# Altium PCB compactPCBv2.PcbDoc
Units mil, origin at the board's own origin, x right, y up, seen from the top; angles counter-clockwise.
Board outline 8500 x 8500 mil, 4 copper layers (LV, SIGLoop, OTHLoop, HV), stack 34.956 mil thick; 100 components, 24 nets, 160 pads, 0 vias.
Unrouted connection lines stored in the file: 1.
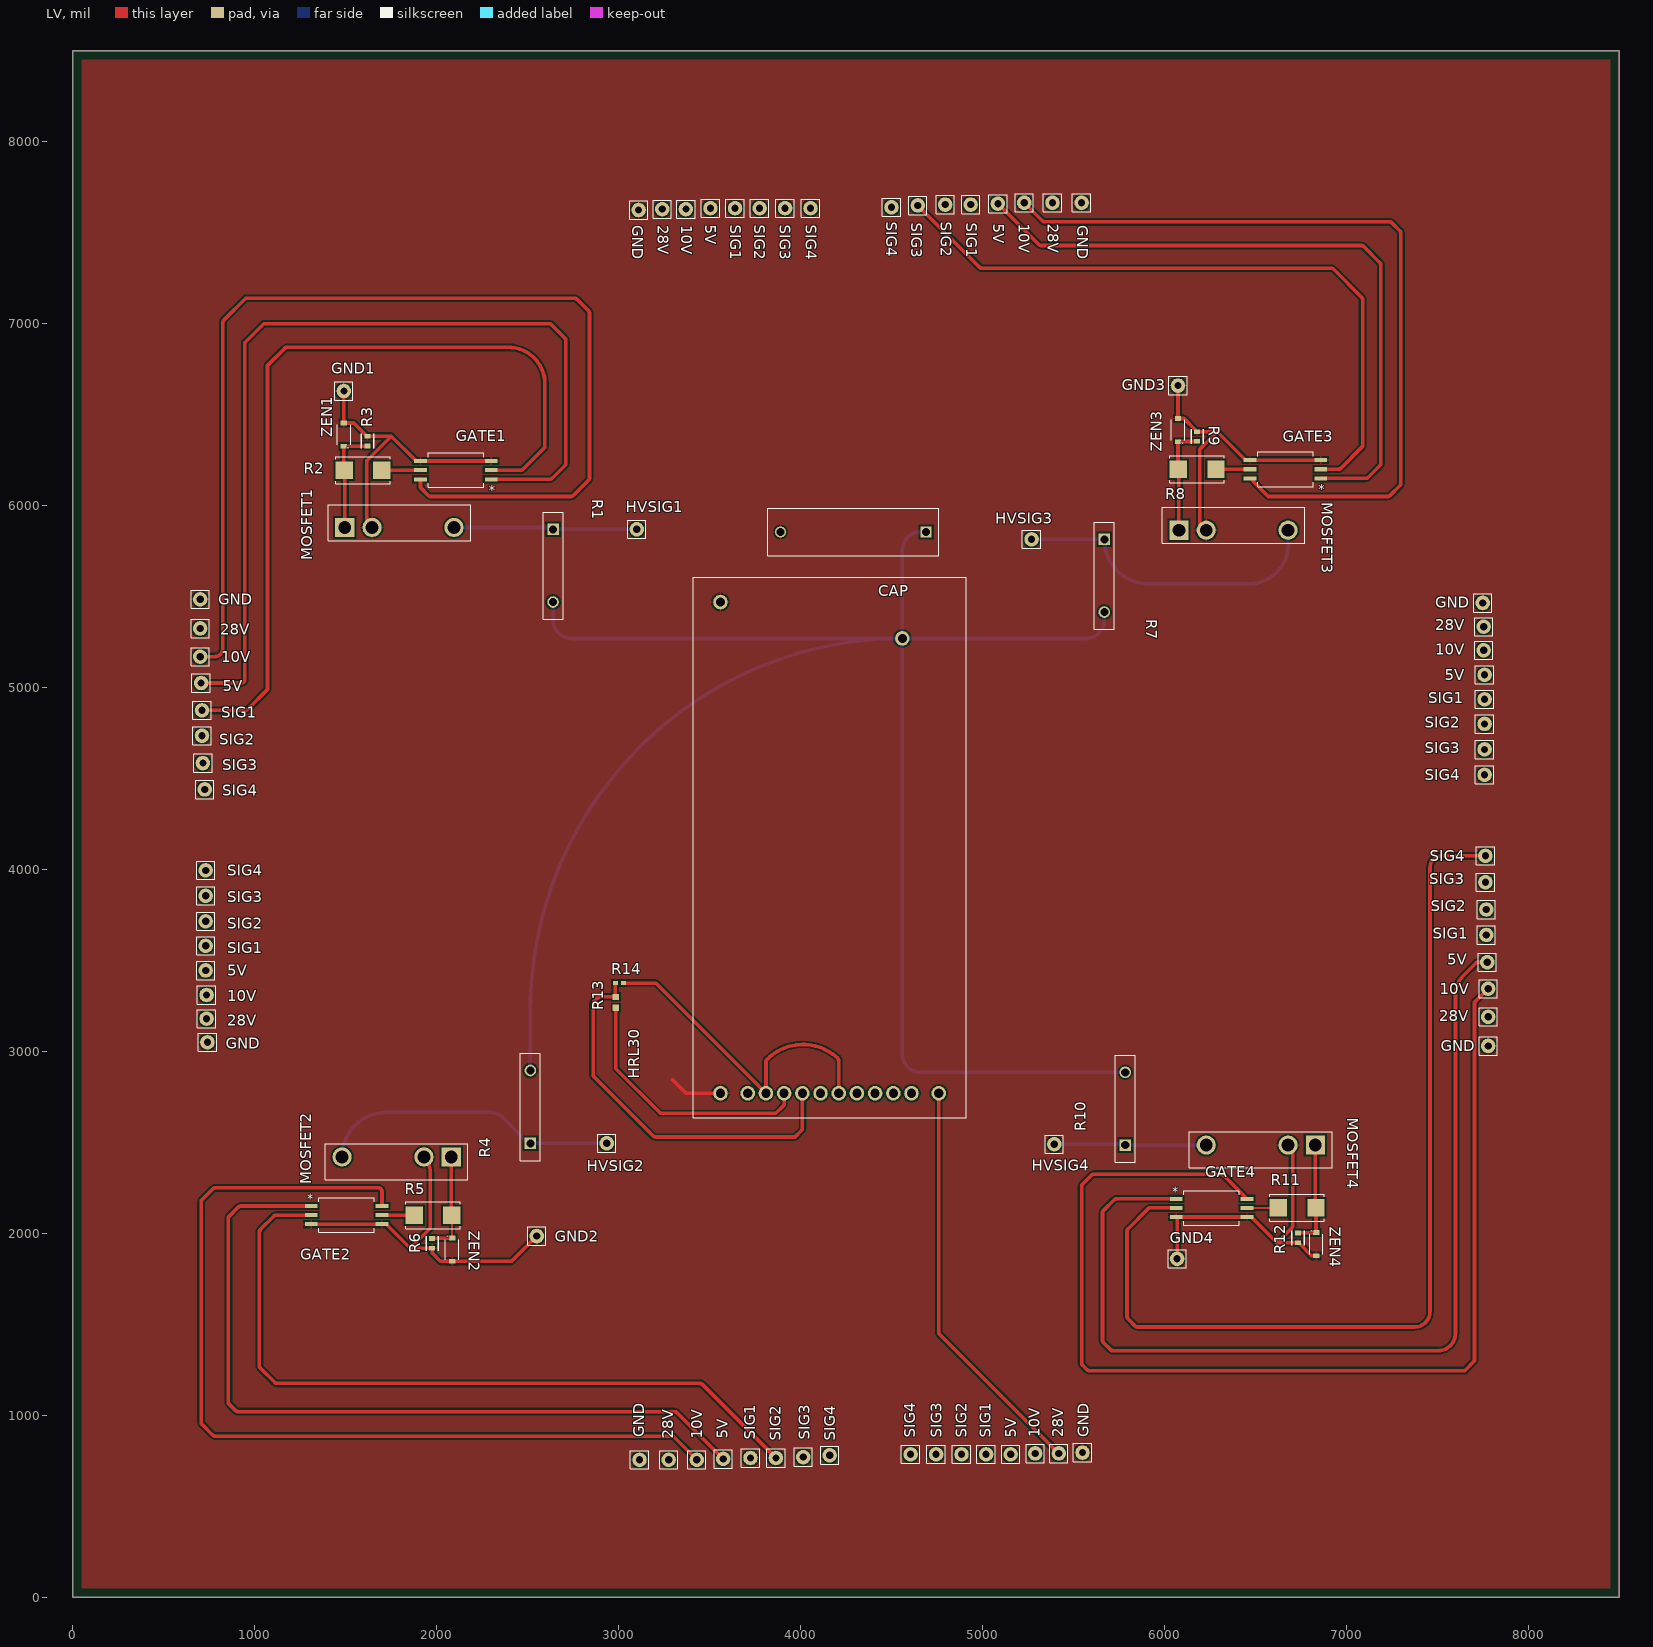
[diagram p0: LV view]
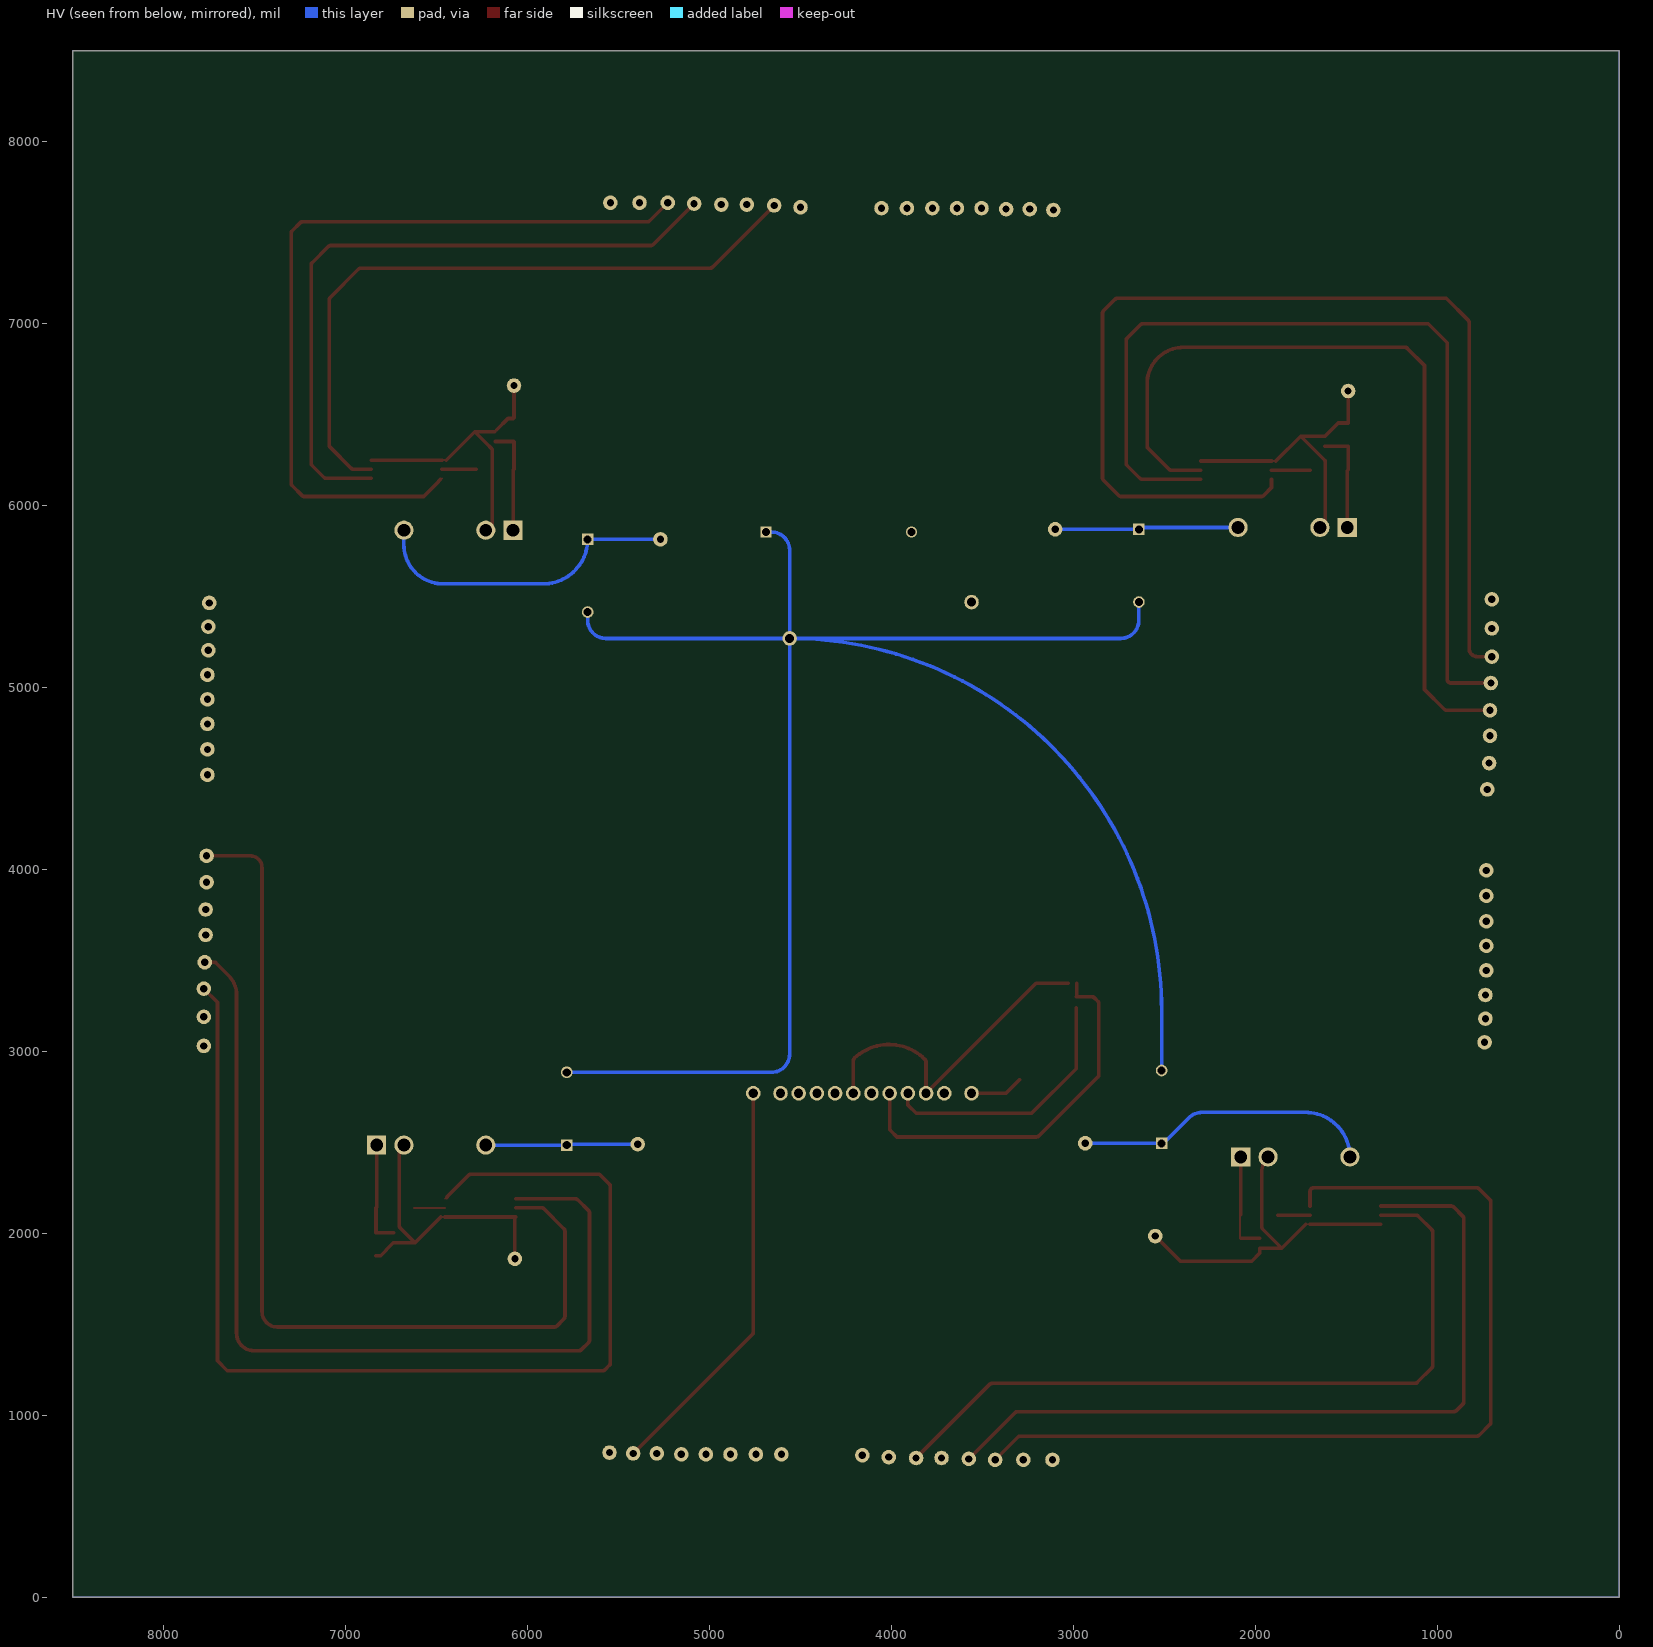
[diagram p1: HV view, seen from below]
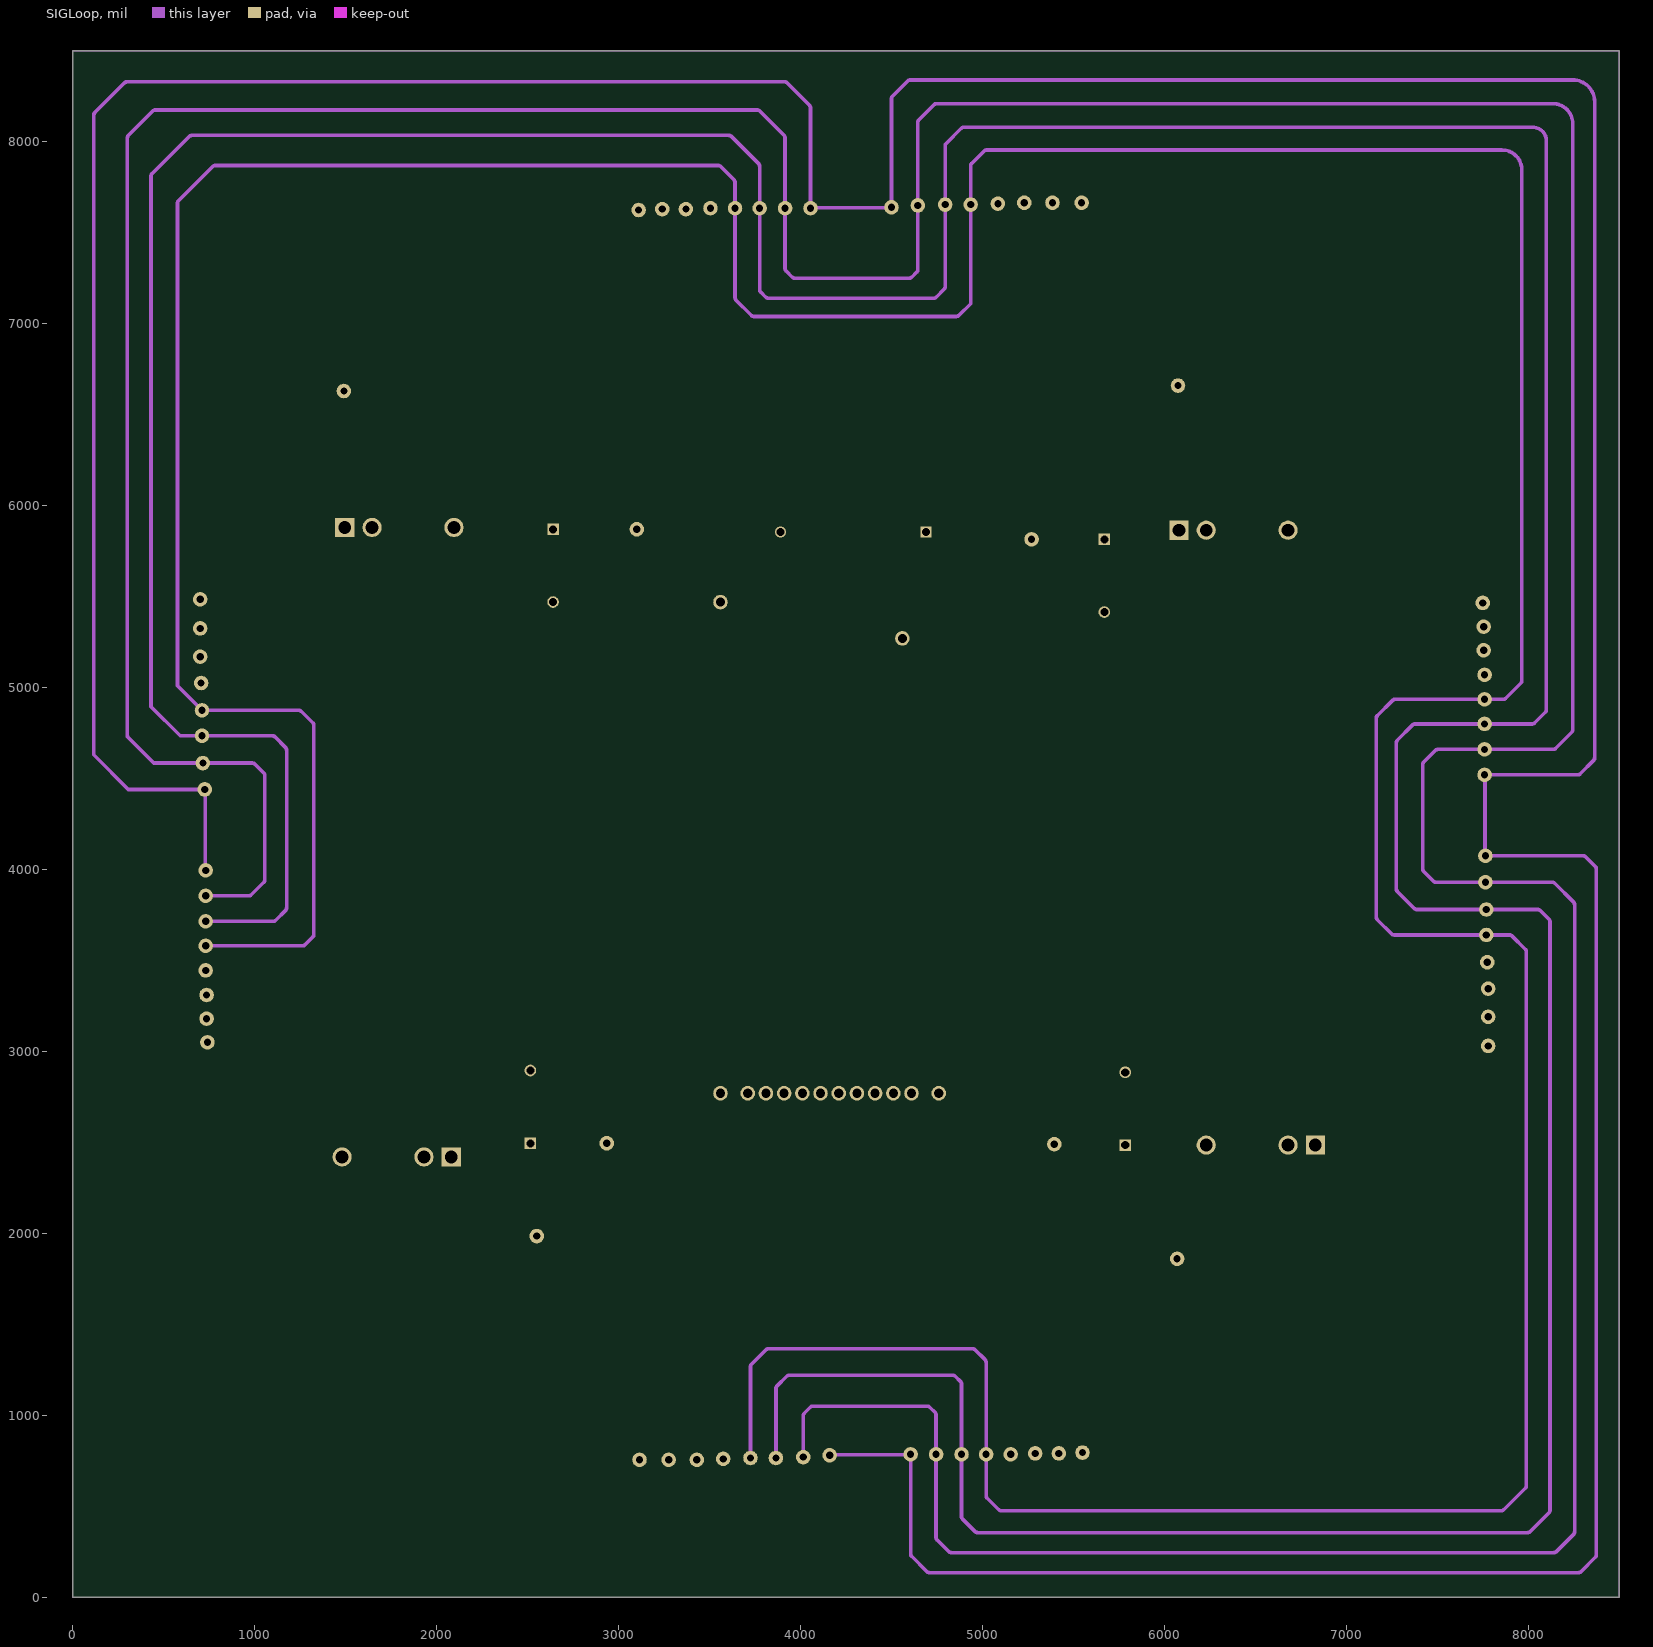
[diagram p2: SIGLoop]
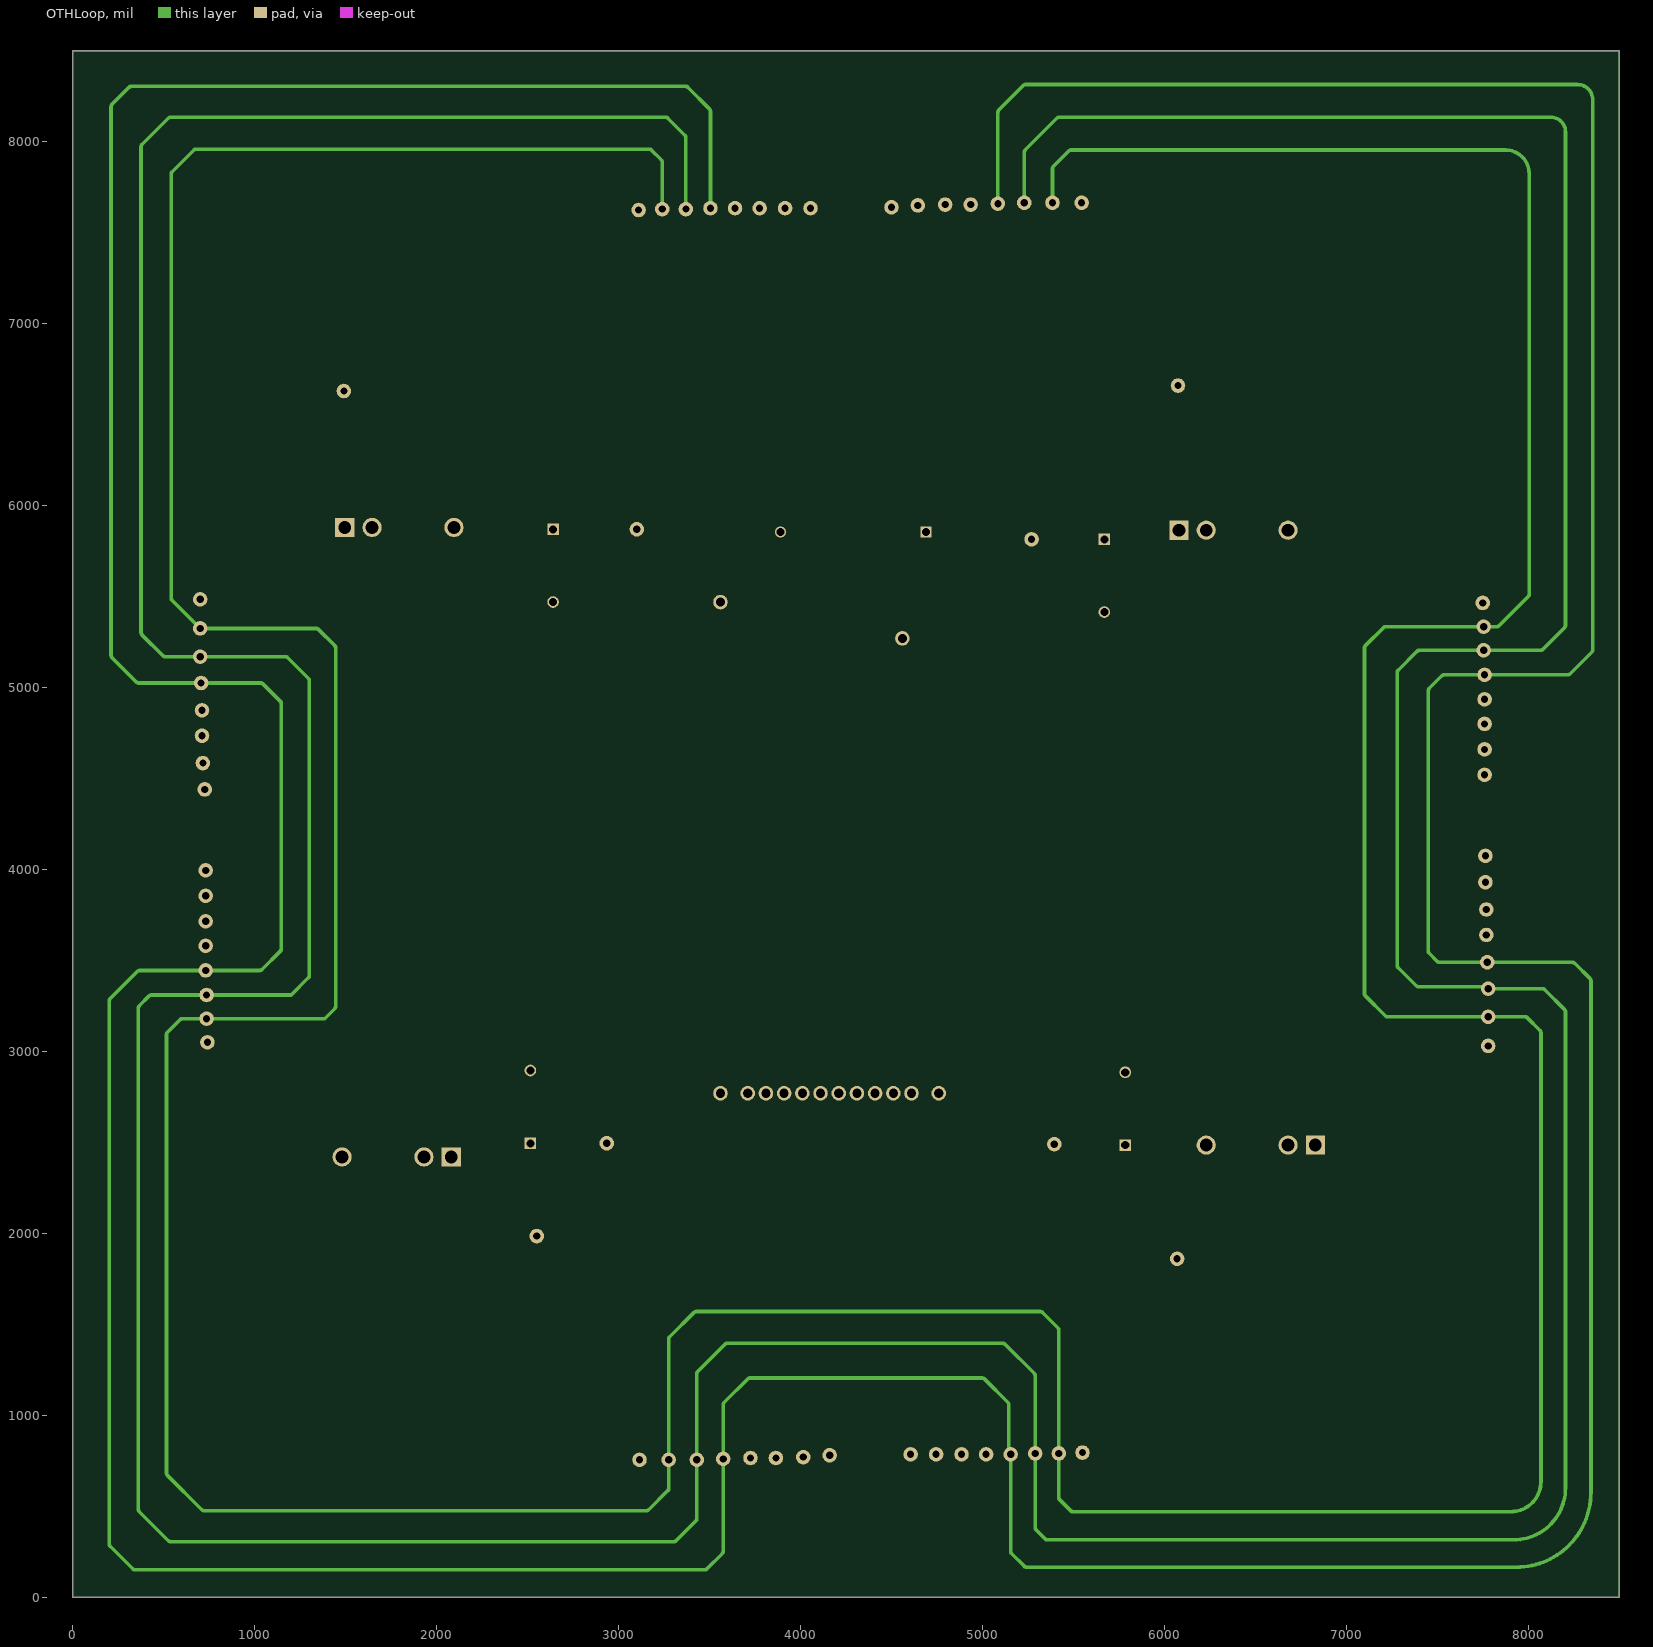
[diagram p3: OTHLoop]

## Layer stack, top to bottom
Top Solder: solder mask 0.4, Solder Resist, Dk 3.5
LV: signal copper 1.378
Dielectric 2: prepreg 2.8, PP-006, Dk 4.1
Dielectric 3: prepreg 2.8, PP-006, Dk 4.1
Dielectric 6: prepreg 2.8, PP-006, Dk 4.1
SIGLoop: signal copper 1.4
Dielectric 1: dielectric 12.6, FR-4, Dk 4.8
OTHLoop: signal copper 1.4
Dielectric 7: prepreg 2.8, PP-006, Dk 4.1
Dielectric 4: prepreg 2.8, PP-006, Dk 4.1
Dielectric 5: prepreg 2.8, PP-006, Dk 4.1
HV: signal copper 1.378
Bottom Solder: solder mask 0.4, Solder Resist, Dk 3.5

## Board outline
0,0 8500,0 8500,8500 0,8500

## Design rules (kind name [scope] priority, off if disabled: settings)
Clearance [All] p1: gap=10 ignorepadtopadclearanceinfootprint=FALSE except(0: Arc-Hole Track-Hole SMDPad-Hole THPad-Hole Via-Hole Fill-Hole Poly-Hole Region-Hole Text-Hole)
Height [All] p1 off: minheight=0 maxheight=1000 prefheight=500
PolygonConnect [All] p1: connectstyle=Relief reliefconductorwidth=10 reliefentries=4 polygonreliefangle="90 Angle" airgapwidth=10
RoutingVias [All] p1: holewidth=28 width=50 viastyle="Through Hole" minholewidth=28 minwidth=50 maxholewidth=28 maxwidth=50
SolderMaskExpansion [All] p1: expansion=4 istentingtop=FALSE
Width [All] p1 off: maxlimit=10 minlimit=10 preferedwidth=10
29 further rules are at their usual default settings.

## Components (designator, comment, footprint, x,y, rotation, side; value= is the part's Value field where it differs from the comment)
5V "Comment" Via 7775,3490 r180 top
5V "Comment" Via 7760,5070 r180 top
5V "Comment" Via 5155,785 r90 top
5V "Comment" Via 3575,760 r90 top
5V "Comment" Via 5085,7660 r270 top
5V "Comment" Via 3505,7635 r270 top
5V "Comment" Via 730,3445 r0 top
5V "Comment" Via 705,5025 r0 top
10V "Comment" Via 7780,3345 r180 top
10V "Comment" Via 7755,5205 r180 top
10V "Comment" Via 5290,790 r90 top
10V "Comment" Via 3430,755 r90 top
10V "Comment" Via 5230,7665 r270 top
10V "Comment" Via 3370,7630 r270 top
10V "Comment" Via 735,3310 r0 top
10V "Comment" Via 700,5170 r0 top
28V "Comment" Via 7780,3190 r180 top
28V "Comment" Via 7755,5335 r180 top
28V "Comment" Via 5420,790 r90 top
28V "Comment" Via 3275,755 r90 top
28V "Comment" Via 5385,7665 r270 top
28V "Comment" Via 3240,7630 r270 top
28V "Comment" Via 735,3180 r0 top
28V "Comment" Via 700,5325 r0 top
CAP "Comment" "HV Capacitor" 4690,5855 r180 top
GATE1 "Comment" "Gate Driver" 2105,6195 r180 top
GATE2 "Comment" "Gate Driver" 1505,2100 r0 top
GATE3 "Comment" "Gate Driver" 6665,6200 r180 top
GATE4 "Comment" "Gate Driver" 6260,2140 r0 top
GND "Comment" Via 7780,3030 r180 top
GND "Comment" Via 7750,5465 r180 top
GND "Comment" Via 5550,795 r90 top
GND "Comment" Via 3115,755 r90 top
GND "Comment" Via 5545,7665 r270 top
GND "Comment" Via 3110,7625 r270 top
GND "Comment" Via 740,3050 r0 top
GND "Comment" Via 700,5485 r0 top
GND1 "Comment" Via 1490,6630 r0 top
GND2 "Comment" Via 2550,1985 r0 top
GND3 "Comment" Via 6075,6660 r0 top
GND4 "Comment" Via 6070,1860 r0 top
HRL30 "Comment" "Step Up Converter" 4703.7,2755.43 r90 top
HVSIG1 "Comment" Via 3100,5870 r0 top
HVSIG2 "Comment" Via 2935,2495 r0 top
HVSIG3 "Comment" Via 5270,5815 r0 top
HVSIG4 "Comment" Via 5395,2490 r0 top
MOSFET1 "Comment" MOSFET 1495,5880 r0 top
MOSFET2 "Comment" MOSFET 2080,2420 r180 top
MOSFET3 "Comment" MOSFET 6080,5865 r0 top
MOSFET4 "Comment" MOSFET 6830,2485 r180 top
R1 "Comment" "HV resistor" 2640,5870 r270 top
R2 "Comment" "Zener Resistor" 1595,6195 r180 top
R3 "Comment" "LV Resistor" 1620,6355 r90 top
R4 "Comment" "HV resistor" 2515,2495 r90 top
R5 "Comment" "Zener Resistor" 1980,2100 r0 top
R6 "Comment" "LV Resistor" 1975,1945 r270 top
R7 "Comment" "HV resistor" 5670,5815 r270 top
R8 "Comment" "Zener Resistor" 6180,6200 r180 top
R9 "Comment" "LV Resistor" 6180,6380 r90 top
R10 "Comment" "HV resistor" 5785,2485 r90 top
R11 "Comment" "Zener Resistor" 6730,2140 r0 top
R12 "Comment" "LV Resistor" 6735,1975 r270 top
R13 "Comment" "330 Ohm" 2985,3270 r90 top
R14 "Comment" "180 Ohm" 3005,3375 r0 top
SIG1 "Comment" Via 7770,3640 r180 top
SIG1 "Comment" Via 7760,4935 r180 top
SIG1 "Comment" Via 5020,785 r90 top
SIG1 "Comment" Via 3725,765 r90 top
SIG1 "Comment" Via 4935,7655 r270 top
SIG1 "Comment" Via 3640,7635 r270 top
SIG1 "Comment" Via 730,3580 r0 top
SIG1 "Comment" Via 710,4875 r0 top
SIG2 "Comment" Via 7770,3780 r180 top
SIG2 "Comment" Via 7760,4800 r180 top
SIG2 "Comment" Via 4885,785 r90 top
SIG2 "Comment" Via 3865,765 r90 top
SIG2 "Comment" Via 4795,7655 r270 top
SIG2 "Comment" Via 3775,7635 r270 top
SIG2 "Comment" Via 730,3715 r0 top
SIG2 "Comment" Via 710,4735 r0 top
SIG3 "Comment" Via 7765,3930 r180 top
SIG3 "Comment" Via 7760,4660 r180 top
SIG3 "Comment" Via 4745,785 r90 top
SIG3 "Comment" Via 4015,770 r90 top
SIG3 "Comment" Via 4645,7650 r270 top
SIG3 "Comment" Via 3915,7635 r270 top
SIG3 "Comment" Via 730,3855 r0 top
SIG3 "Comment" Via 715,4585 r0 top
SIG4 "Comment" Via 7765,4075 r180 top
SIG4 "Comment" Via 7760,4520 r180 top
SIG4 "Comment" Via 4605,785 r90 top
SIG4 "Comment" Via 4160,780 r90 top
SIG4 "Comment" Via 4500,7640 r270 top
SIG4 "Comment" Via 4055,7635 r270 top
SIG4 "Comment" Via 730,3995 r0 top
SIG4 "Comment" Via 725,4440 r0 top
ZEN1 "Comment" "Zener Diode" 1490,6390 r90 top
ZEN2 "Comment" "Zener Diode" 2085,1910 r270 top
ZEN3 "Comment" "Zener Diode" 6075,6415 r90 top
ZEN4 "Comment" "Zener Diode" 6835,1940 r270 top

## Footprints (in the part's own frame and the unit in brackets; to place one, negate y for a bottom-side part, rotate by r counter-clockwise, add the part's x,y. Pads: shape width x height; smd on the part's side, far side on the other; paste and mask are expansions set on the pad)
"180 Ohm" [mil] "RES_RK73H1E_KOA"
  rect 26x22 smd paste+0 mask+0: 1(-22.5,0) 2(22.5,0)
  body extent 0,0 10,10, height 10
"330 Ohm" [mm] "RESC1508X55N"
  rect 0.87x0.93 smd: 1(-0.755,0) 2(0.755,0)
"Gate Driver" [mil] "ADuM4120"
  rect 69.53x22.08 smd paste+0 mask+0: 1(-194.13,50) 2(-194.13,0) 3(-194.13,-50) 4(194.13,-50) 5(194.13,0) 6(194.13,50)
  silkscreen extent -153,-95 153,95, body extent 0,0 10,10, height 10
"HV Capacitor" [mil] "SV17_AVX"
  rect 62x62 hole 42 mask+0: 1(0,0)
  round 62 hole 42 mask+0: 2(800,0)
  silkscreen extent -70,-130 870,130, body extent 0,0 10,10, height 10
"HV resistor" [mil] "RES_SM10203_OHM"
  rect 64x64 hole 44 mask+0: 1(0,0)
  round 64 hole 44 mask+0: 2(400,0)
  silkscreen extent -95,-55 495,55, body extent 0,0 10,10, height 10
"LV Resistor" [mil] "Yageo_AC0603_IPC_C"
  rect 25.93x31.97 smd paste+0 mask+0: 1(-26.64,0) 2(26.64,0)
  silkscreen extent -40,-33 40,33, body extent -44,-22 44,22, height 10
MOSFET [mm]
  rect 2.67x2.67 hole 1.78: 1(0,0)
  round 2.67 hole 1.78: 2(3.81,0) 3(15.24,0)
  silkscreen extent -2.34,-1.85 17.58,3.17, body extent -2.34,-1.85 17.58,3.17, height 26.52
"Step Up Converter" [mil] "HRL30"
  round 80 hole 50: 1(14.57,1143.7) 2(14.57,993.7) 3(14.57,893.7) 4(14.57,793.7) 5(14.57,693.7) 6(14.57,593.7) 7(14.57,493.7) 8(14.57,393.7) 9(14.57,293.7) 10(14.57,193.7) 11(14.57,93.7) 12(14.57,-56.3) 13(2514.57,143.7) 14(2714.57,1143.7)
  silkscreen extent -120,-206 2850,1294
Via [mil]
  round 80 hole 40: VIA(0,0)
  silkscreen extent -50,-50 50,50
"Zener Diode" [mil] "DIO_KDZLVTF100_ROM"
  rect 26x35 smd paste+0 mask+0: 1(-64,0) 2(64,0)
  silkscreen extent -56,-36 56,36, body extent 0,0 10,10, height 10
"Zener Resistor" [mil] "BO_PWR3014"
  rect 95x95 smd paste+0 mask+0: 1(-103.5,0) 2(103.5,0)
  silkscreen extent -150,-74 150,74, body extent 0,0 10,10, height 10

## Nets (pads, with @x,y where several pads share a name; then routed paths per layer and width w, separated by ;. In a path a pad name is that pad's centre, name@x,y a point inside that pad or via, vN(x,y) a via of type N, cw(c..) or ccw(c..) an arc to the next point about the centre after c; other vN are vias at no path point)
3kV: CAP.1 HRL30.13 R1.2 R4.2 R7.2 R10.2 | length 11080.4
  LV w10: HRL30.13 HRL30.13@4560,5277.78
  HV w10: HRL30.13@4560,5265 HRL30.13@4565,5270
  HV w20: R4.2 2515,3225 cw(c4560,3225) HRL30.13 ; R1.2 2640,5370 ccw(c2740,5370) 2740,5270 HRL30.13 ; HRL30.13@4565,5270 5570,5270 ccw(c5570,5370) 5670,5370 R7.2 ; CAP.1 4660,5855 ccw(c4660,5755) 4560,5755 HRL30.13 ; R10.2 4660,2885 cw(c4660,2985) 4560,2985 4560,5265 HRL30.13
5V: 5V.VIA GATE1.1 GATE2.1 GATE3.1 GATE4.1 | length 55213.4
  LV w20: 5V.VIA@705,5025 925,5025 ccw(c925,5045) 945,5044.93 945,6895 1050,7000 1179.14,7000 2345.86,7000 2616.72,7000 cw(c2616.72,6980) 2630.8,6994.2 2704.11,6920.9 cw(c2690,6906.72) 2710,6906.72 2710,6233.28 cw(c2690,6233.28) 2704.18,6219.18 2635.82,6150.82 cw(c2621.72,6165) 2621.72,6145 GATE1.1 ; GATE2.1 923.28,2150 923.22,2150 ccw(c923.28,2130) 909.18,2144.18 860.8,2095.8 ccw(c875,2081.72) 855,2081.78 855,1073.28 ccw(c875,1073.28) 860.82,1059.18 894.2,1025.8 ccw(c908.28,1040) 908.22,1020 3306.72,1020 cw(c3306.72,1000) 3320.86,1014.14 5V.VIA@3575,760 ; 5V.VIA@5085,7660 5309.14,7435.86 5309.18,7435.82 ccw(c5323.28,7450) 5323.28,7430 7081.72,7430 cw(c7081.72,7410) 7095.86,7424.14 7184.18,7335.82 cw(c7170,7321.72) 7190,7321.78 7190,7321.72 7190,6233.28 cw(c7170,6233.28) 7184.18,6219.18 7120.82,6155.82 cw(c7106.72,6170) 7106.72,6150 GATE3.1 ; GATE4.1 5738.28,2190 5738.22,2190 ccw(c5738.28,2170) 5724.18,2184.18 5665.8,2125.8 ccw(c5680,2111.72) 5660,2111.78 5660,1413.28 ccw(c5680,1413.28) 5665.82,1399.18 5704.2,1360.8 ccw(c5718.28,1375) 5718.22,1355 7505,1355 ccw(c7505,1450) 7600,1450 7600,3311.81 cw(c7748.24,3311.1) 7642.89,3415.39 7715,3487.5 cw(c7721.61,3480) 7721.57,3490 5V.VIA@7775,3490
  OTHLoop w10: 5V.VIA@5145,795 5V.VIA@5155,785
  OTHLoop w20: 5V.VIA@3505,7635 3505,8166.72 3505,8166.78 ccw(c3485,8166.72) 3499.18,8180.82 3380.86,8299.14 ccw(c3366.72,8285) 3366.72,8305 323.28,8305 ccw(c323.28,8285) 309.18,8299.18 215.8,8205.8 ccw(c230,8191.72) 210,8191.78 210,5178.28 ccw(c230,5178.28) 215.82,5164.18 349.19,5030.81 ccw(c363.28,5045) 363.28,5025 705,5025 1031.72,5025 cw(c1031.72,5005) 1045.8,5019.2 1139.11,4925.89 cw(c1125,4911.72) 1145,4911.72 1145,3563.28 cw(c1125,3563.28) 1139.18,3549.18 1040.82,3450.82 cw(c1026.72,3465) 1026.72,3445 730,3445 368.28,3445 368.22,3445 ccw(c368.28,3425) 354.18,3439.18 205.86,3290.86 ccw(c220,3276.72) 200,3276.72 200,293.28 ccw(c220,293.28) 205.82,279.18 329.14,155.86 329.18,155.82 ccw(c343.28,170) 343.28,150 3471.72,150 ccw(c3471.72,170) 3485.82,155.82 3569.2,239.2 ccw(c3555,253.28) 3575,253.28 3575,760 3575,1056.78 cw(c3595,1056.72) 3580.8,1070.8 3709.18,1199.18 cw(c3723.28,1185) 3723.28,1205 4996.72,1205 cw(c4996.72,1185) 5010.86,1199.14 5139.18,1070.82 cw(c5125,1056.72) 5145,1056.78 5145,1056.72 5V.VIA@5145,795 ; 5V.VIA@5085,7660 5085,8161.78 cw(c5105,8161.72) 5090.8,8175.8 5224.14,8309.14 cw(c5238.28,8295) 5238.28,8315 8269.94,8315 cw(c8270,8230) 8355,8230 8355,5208.28 cw(c8335,5208.28) 8349.2,5194.2 8230.82,5075.82 cw(c8216.72,5090) 8216.72,5070 7760,5070 7538.28,5070 7538.22,5070 ccw(c7538.28,5050) 7524.18,5064.18 7455.86,4995.86 7451.14,4988.38 ccw(c7470,4981.72) 7450,4981.72 7450,3553.28 ccw(c7470,3553.28) 7455.82,3539.18 7499.2,3495.8 ccw(c7513.28,3510) 7513.22,3490 7775,3490 8241.72,3490 cw(c8241.72,3470) 8255.8,3484.2 8339.1,3400.89 cw(c8325,3386.72) 8345,3386.72 8345,576.16 cw(c7933.84,576.16) 7934.94,165 5243.28,165 cw(c5243.28,185) 5229.18,170.82 5229.14,170.86 5160.82,239.18 cw(c5175,253.28) 5155,253.28 5V.VIA@5155,785
10V: 10V.VIA GATE1.6 GATE2.6 GATE3.6 GATE4.6 | length 56761.5
  LV w10: GATE4.6@6443.94,2196.04 GATE4.6 ; GATE3.6 6477.17,6146.26 6477.22,6146.23 cw(c6472.04,6137.68) GATE3.6@6479.53,6144.3 ; 6501.5,6119.41 ccw(c6509.02,6125.99) 6501.91,6118.96
  LV w20: 10V.VIA@700,5170 780,5170 ccw(c780,5215) 825,5215 825,7006.78 cw(c845,7006.72) 830.8,7020.8 950,7140 2756.72,7140 cw(c2756.72,7120) 2770.8,7134.2 2834.11,7070.9 cw(c2820,7056.72) 2840,7056.72 2840,6153.28 cw(c2820,6153.28) 2834.18,6139.18 2750.86,6055.86 cw(c2736.72,6070) 2736.72,6050 1968.28,6050 cw(c1968.28,6070) 1954.18,6055.82 1954.14,6055.86 1910.87,6099.13 GATE1.6 ; GATE2.6 1699.13,2230 ccw(c1679.13,2230) 1679.13,2250 783.28,2250 ccw(c783.28,2230) 769.14,2244.14 710.8,2185.8 ccw(c725,2171.72) 705,2171.78 705,963.28 ccw(c725,963.28) 710.82,949.18 769.2,890.8 ccw(c783.28,905) 783.22,885 3291.72,885 cw(c3291.72,865) 3305.86,879.14 10V.VIA@3430,755 ; 10V.VIA@5230,7665 5329.14,7565.86 ccw(c5343.28,7580) 5343.28,7560 7236.72,7560 cw(c7236.72,7540) 7250.8,7554.2 7294.18,7510.82 cw(c7280,7496.72) 7300,7496.78 7300,7496.72 7300,6123.28 cw(c7280,6123.28) 7294.18,6109.18 7240.82,6055.82 cw(c7226.72,6070) 7226.72,6050 6574.97,6050 cw(c6575.02,6060) 6567.92,6052.95 6501.91,6118.96 ; GATE4.6@6443.94,2196.04 ccw(c6433.94,2196.04) 6441.06,2203.07 6324.98,2319.14 ccw(c6310.84,2305) 6310.84,2325 5613.28,2325 ccw(c5613.28,2305) 5599.18,2319.18 5550.8,2270.8 ccw(c5565,2256.72) 5545,2256.78 5545,1288.28 ccw(c5565,1288.28) 5550.82,1274.18 5550.86,1274.14 5574.2,1250.8 ccw(c5588.28,1265) 5588.22,1245 7650.86,1245 7705,1299.14 7705,3270 10V.VIA@7780,3345 ; GATE3.6@6479.53,6144.3 6501.5,6119.41
  OTHLoop w10: 10V.VIA@7770,3355 10V.VIA@7780,3345
  OTHLoop w20: 10V.VIA@3370,7630 3370,8021.72 3370,8021.78 ccw(c3350,8021.72) 3364.18,8035.82 3270.86,8129.14 ccw(c3256.72,8115) 3256.72,8135 538.28,8135 ccw(c538.28,8115) 524.18,8129.18 380.8,7985.8 ccw(c395,7971.72) 375,7971.78 375,5303.19 ccw(c395,5303.28) 380.79,5289.21 494.17,5175.83 ccw(c508.28,5190) 508.28,5170 700,5170 1166.72,5170 cw(c1166.72,5150) 1180.86,5164.14 1294.14,5050.86 cw(c1280,5036.72) 1300,5036.78 1300,5036.72 1300,3418.28 cw(c1280,3418.28) 1294.2,3404.2 1200,3310 735,3310 433.28,3310 433.22,3310 ccw(c433.28,3290) 419.18,3304.18 365.8,3250.8 ccw(c380,3236.72) 360,3236.78 360,483.28 ccw(c380,483.28) 365.82,469.18 524.14,310.86 524.18,310.82 ccw(c538.28,325) 538.28,305 3301.72,305 ccw(c3301.72,325) 3315.82,310.82 3424.2,419.2 ccw(c3410,433.28) 3430,433.28 3430,755 3430,1226.78 cw(c3450,1226.72) 3435.8,1240.8 3584.18,1389.18 cw(c3598.28,1375) 3598.28,1395 5111.72,1395 cw(c5111.72,1375) 5125.86,1389.14 5284.18,1230.82 cw(c5270,1216.72) 5290,1216.78 5290,1216.72 5290,790 5290,383.28 ccw(c5310,383.28) 5295.82,369.18 5344.2,320.8 ccw(c5358.28,335) 5358.22,315 7920.81,315 7920.87,315 ccw(c7920,600) 8205,600 8205,3216.72 ccw(c8185,3216.72) 8199.1,3230.9 8090.8,3339.2 ccw(c8076.72,3325) 8076.72,3345 10V.VIA@7780,3345 ; 10V.VIA@5230,7665 5230,7941.78 cw(c5250,7941.72) 5235.8,7955.8 5409.14,8129.14 cw(c5423.28,8115) 5423.28,8135 8124.94,8135 cw(c8125,8055) 8205,8055 8205,5343.28 cw(c8185,5343.28) 8199.2,5329.2 8080.82,5210.82 cw(c8066.72,5225) 8066.72,5205 7755,5205 7403.28,5205 7403.22,5205 ccw(c7403.28,5185) 7389.18,5199.18 7285.8,5095.8 ccw(c7300,5081.72) 7280,5081.78 7280,3473.28 ccw(c7300,3473.28) 7285.82,3459.18 7384.2,3360.8 ccw(c7398.28,3375) 7398.22,3355 10V.VIA@7770,3355
28V: 28V.VIA HRL30.12 | length 35419
  LV w20: HRL30.12 4760,1454.14 ccw(c4770,1454.14) 4762.93,1447.07 28V.VIA@5420,790
  OTHLoop w20: 28V.VIA@3240,7630 3240,7886.72 ; 3240,7886.73 ccw(c3220,7886.72) 3234.14,7900.86 3180.86,7954.14 ccw(c3166.72,7940) 3166.72,7960 678.28,7960 678.22,7960 ccw(c678.28,7940) 664.18,7954.18 545.8,7835.8 ccw(c560,7821.72) 540,7821.78 540,5493.28 ccw(c560,5493.28) 545.82,5479.18 545.86,5479.14 700,5325 1336.72,5325 cw(c1336.72,5305) 1350.8,5319.2 1439.18,5230.82 cw(c1425,5216.72) 1445,5216.78 1445,5216.72 1445,3248.28 cw(c1425,3248.28) 1439.18,3234.18 1385,3180 767.91,3180 760.86,3180 735,3180 603.28,3180 603.22,3180 ccw(c603.28,3160) 589.18,3174.18 520.8,3105.8 ccw(c535,3091.72) 515,3091.78 515,683.28 ccw(c535,683.28) 520.82,669.18 520.86,669.14 709.2,480.8 ccw(c723.28,495) 723.22,475 3151.72,475 ccw(c3151.72,495) 3165.82,480.82 3269.2,584.2 ccw(c3255,598.28) 3275,598.28 3275,755 3275,1416.78 cw(c3295,1416.72) 3280.8,1430.8 3414.18,1564.18 cw(c3428.28,1550) 3428.28,1570 5316.72,1570 cw(c5316.72,1550) 5330.86,1564.14 5414.18,1480.82 cw(c5400,1466.72) 5420,1466.78 5420,1466.72 5420,790 5420,548.2 ccw(c5440,548.28) 5425.8,534.2 5484.16,475.84 ccw(c5498.28,490) 5498.28,470 7905.47,470 ccw(c7905,635) 8070,635 8070,3101.72 ccw(c8050,3101.72) 8064.14,3115.86 7995.8,3184.2 ccw(c7981.72,3170) 7981.72,3190 7780,3190 7228.22,3190 cw(c7228.28,3210) 7214.2,3195.8 7105.82,3304.18 cw(c7120,3318.28) 7100,3318.28 7100,5216.78 cw(c7120,5216.72) 7105.8,5230.8 7204.18,5329.18 cw(c7218.28,5315) 7218.22,5335 7218.28,5335 7755,5335 7826.72,5335 ccw(c7826.72,5355) 7840.82,5340.82 7999.2,5499.2 ccw(c7985,5513.28) 8005,5513.28 8005,7825 ccw(c7875,7825) 7875,7955 5488.28,7955 ccw(c5488.28,7935) 5474.14,7949.14 5390.8,7865.8 ccw(c5405,7851.72) 5385,7851.78 28V.VIA@5385,7665
GND: CAP.2 GATE1.3 GATE1.4 GATE2.3 GATE2.4 GATE3.3 GATE3.4 GATE4.3 GATE4.4 GND1.VIA GND2.VIA GND3.VIA GND4.VIA GND.VIA HRL30.1 HRL30.14 MOSFET1.2 MOSFET2.2 MOSFET3.2 MOSFET4.2 R3.2 R6.2 R9.2 R12.2 ZEN1.2 ZEN2.2 ZEN3.2 ZEN4.2 | length 7236.7
  LV w10: R3.2@1616.98,6381.64 R3.2 ; MOSFET1.2@1636,5893.14 ccw(c1646,5893.14) MOSFET1.2@1638.91,5886.09 ; MOSFET1.2@1638.93,5886.07 MOSFET1.2 ; GATE2.4 GATE2.4@1722.85,2050 ; GATE1.4@1887.15,6245 GATE1.4 ; GATE4.3 GATE4.3@6070,2085.87 ; ZEN3.2@6075,6483.5 ZEN3.2@6079.5,6479 ; R9.2@6169.01,6417.49 6169.01,6414.61 6176.98,6406.64 R9.2 ; GATE3.4@6447.15,6250 GATE3.4 ; GATE4.4 GATE4.4@6477.85,2090 ; R12.2 R12.2@6738.02,1948.36 ; 6776.67,1906.69 6776.67,1909.71 ; ZEN4.2 ZEN4.2@6839.5,1876
  LV w20: GATE2.3 GATE2.4 ; GND1.VIA ZEN1.2 1544.62,6454 R3.2@1616.98,6381.64 ; R3.2 1750.51,6381.64 ; MOSFET1.2 1638.91,5886.09 1615,5910 1615,6237.85 cw(c1635,6237.85) 1620.86,6251.99 1750.51,6381.64 ; GATE2.4@1722.85,2050 1854.49,1918.36 ; GATE1.4@1887.15,6245 1750.51,6381.64 ; GATE1.4 GATE1.3 ; MOSFET2.2 cw(c1845.5,2335.5) 1965,2335.41 1965,2329.69 1965,2037.15 cw(c1945,2037.15) 1959.14,2023.01 1854.49,1918.36 ; GND2.VIA 2411,1846 ZEN2.2 2020.38,1846 1975,1891.38 R6.2 1854.49,1918.36 ; 3295,2845 3370,2770 HRL30.1 ; GATE4.3 GATE4.4 ; GND4.VIA GATE4.3@6070,2085.87 ; ZEN3.2@6075,6483.5 GND3.VIA ; ZEN3.2@6079.5,6479 6107.5,6479 R9.2@6169.01,6417.49 ; R9.2 6290.51,6406.64 ; MOSFET3.2 6195,5900 6195,6302.85 cw(c6215,6302.85) 6196.14,6309.52 6200.86,6316.99 6209.54,6325.67 cw(c6223.62,6311.47) 6209.75,6325.88 ccw(c6195.99,6340.39) 6210.5,6326.62 cw(c6224.91,6312.76) 6210.71,6326.84 6290.51,6406.64 ; GATE3.4@6447.15,6250 6290.51,6406.64 ; GATE3.4 GATE3.3 ; GATE4.4@6477.85,2090 6619.49,1948.36 ; MOSFET4.2 6689,2476 6699.14,2465.86 cw(c6685,2451.72) 6705,2451.72 6705,2042.15 cw(c6685,2042.15) 6699.14,2028.01 6619.49,1948.36 ; R12.2 6619.49,1948.36 ; R12.2@6738.02,1948.36 6776.67,1909.71 ; 6776.67,1906.69 6807.36,1876 ZEN4.2
HVSIG1: HVSIG1.VIA MOSFET1.3 R1.1 | length 995
  HV w20: MOSFET1.3 R1.1@2630,5880 ; R1.1 HVSIG1.VIA
HVSIG2: HVSIG2.VIA MOSFET2.3 R4.1 | length 1660
  HV w20: MOSFET2.3 cw(c1725,2420) 1725,2665 2292.48,2665 cw(c2292.57,2562.57) 2365.09,2634.91 2499.19,2500.81 ccw(c2513.28,2515) 2513.22,2495 R4.1 HVSIG2.VIA
HVSIG3: HVSIG3.VIA MOSFET3.3 R7.1 | length 1752.6
  HV w20: HVSIG3.VIA R7.1 ccw(c5915,5815) 5915,5570 6465,5570 ccw(c6465,5785) 6680,5785 MOSFET3.3
HVSIG4: HVSIG4.VIA MOSFET4.3 R10.1 | length 830
  HV w20: HVSIG4.VIA R10.1@5780,2490 ; R10.1 MOSFET4.3
NetB1: HRL30.3 HRL30.7 R14.2 | length 1844
  LV w20: R14.2 3205,3375 HRL30.3 3810,2941.78 cw(c3830,2941.72) 3815.8,2955.8 3816.15,2956.15 cw(c4013.36,2759.05) 4203.69,2962.8 cw(c4190,2948.22) 4210,2948.22 HRL30.7
NetB2: HRL30.5 R13.2 R14.1 | length 2119.8
  LV w10: R13.2@2982.5,3302.22 R13.2
  LV w20: R13.2@2982.5,3302.22 R14.1 ; R13.2 2898.01,3299.72 2897.95,3299.72 ccw(c2898.01,3279.72) 2883.9,3293.9 2865.8,3275.8 ccw(c2880,3261.72) 2860,3261.78 2860,2873.28 ccw(c2880,2873.28) 2865.82,2859.18 3189.42,2535.58 ccw(c3203.5,2549.78) 3203.44,2529.78 3969.78,2529.78 4004.2,2564.2 ccw(c3990,2578.28) 4010,2578.28 HRL30.5
NetB3: HRL30.4 R13.1 | length 1444.5
  LV w10: HRL30.4@3910,2751.47 HRL30.4
  LV w20: R13.1 2985,2905 3230,2660 3864.14,2660 3907.07,2702.93 ccw(c3900,2710) 3910,2710 HRL30.4@3910,2751.47
NetD1: MOSFET1.1 R2.2 R3.1 ZEN1.1 | length 579
  LV w10: R2.2@1490,6196.5 R2.2 R2.2@1495,6191.5 ; ZEN1.1 ZEN1.1@1491.18,6327.18 ; R3.1@1618.82,6327.18 R3.1
  LV w20: R2.2@1490,6196.5 ZEN1.1 ; ZEN1.1@1491.18,6327.18 R3.1@1618.82,6327.18 ; MOSFET1.1 R2.2@1495,6191.5
NetD2: MOSFET2.1 R5.2 R6.1 ZEN2.1 | length 555.8
  LV w10: R6.1 R6.1@1976.18,1972.82 ; R5.2@2080,2103.5 R5.2 2083.5,1976 ZEN2.1@2080.32,1972.82
  LV w20: R6.1@1976.18,1972.82 ZEN2.1@2080.32,1972.82 ; R5.2@2080,2103.5 MOSFET2.1
NetD3: MOSFET3.1 R8.2 R9.1 ZEN3.1 | length 594
  LV w10: R8.2@6075,6201.5 R8.2 R8.2@6080,6196.5 ; ZEN3.1 ZEN3.1@6076.18,6352.18 ; R9.1@6178.82,6352.18 R9.1
  LV w20: R8.2@6075,6201.5 ZEN3.1 ; ZEN3.1@6076.18,6352.18 R9.1@6178.82,6352.18 ; MOSFET3.1 R8.2@6080,6196.5
NetD4: MOSFET4.1 R11.2 R12.1 ZEN4.1 | length 584
  LV w10: R12.1 R12.1@6736.18,2002.82 ; R11.2@6830,2143.5 R11.2 ; ZEN4.1@6833.5,2005.5 ZEN4.1 ZEN4.1@6833.82,2002.82
  LV w20: R12.1@6736.18,2002.82 ZEN4.1@6833.82,2002.82 ; R11.2@6830,2143.5 MOSFET4.1 ; ZEN4.1@6833.5,2005.5 R11.2
NetR1: GATE1.5 R2.1 | length 212.4
  LV w20: R2.1 GATE1.5
NetR2: GATE2.5 R5.1 | length 177.4
  LV w20: GATE2.5 R5.1
NetR3: GATE3.5 R8.1 | length 187.4
  LV w20: R8.1 GATE3.5
NetR4: GATE4.5 R11.1 | length 172.4
  LV w10: GATE4.5 R11.1
SIG1: GATE1.2 SIG1.VIA | length 33230.4
  LV w20: SIG1.VIA@710,4875 947.57,4875 ccw(c947.57,4895) 961.68,4880.82 1070,4989.14 1070,6770 1164.14,6864.14 cw(c1178.28,6850) 1178.28,6870 2395,6870 cw(c2395,6670) 2595,6670.63 2595,6328.28 cw(c2575,6328.28) 2589.2,6314.2 2475.82,6200.82 cw(c2461.72,6215) 2461.72,6195 GATE1.2
  SIGLoop w20: SIG1.VIA@730,3580 1261.72,3580 ccw(c1261.72,3600) 1275.82,3585.82 1319.2,3629.2 ccw(c1305,3643.28) 1325,3643.28 1325,4791.72 1325,4791.78 ccw(c1305,4791.72) 1319.18,4805.82 1255.89,4869.1 ccw(c1241.72,4855) 1241.72,4875 710,4875 575,5010 575,7661.78 cw(c595,7661.72) 580.8,7675.8 769.18,7864.18 cw(c783.28,7850) 783.22,7870 783.28,7870 3546.72,7870 cw(c3546.72,7850) 3560.86,7864.14 3634.14,7790.86 cw(c3620,7776.72) 3640,7776.73 ; 3640,7776.72 3640,7635 3640,7143.28 ccw(c3660,7143.28) 3645.82,7129.18 3729.2,7045.8 ccw(c3743.28,7060) 3743.22,7040 4856.72,7040 ccw(c4856.72,7060) 4870.82,7045.82 4935,7110 4935,7655 4935,7866.78 cw(c4955,7866.72) 4940.8,7880.8 5009.18,7949.18 cw(c5023.28,7935) 5023.28,7955 7855,7955 cw(c7855,7845) 7965,7845 7965,5038.28 cw(c7945,5038.28) 7959.2,5024.2 7875.82,4940.82 cw(c7861.72,4955) 7861.72,4935 7760,4935 7268.28,4935 7268.22,4935 ccw(c7268.28,4915) 7254.18,4929.18 7170.8,4845.8 ccw(c7185,4831.72) 7165,4831.78 7165,3738.28 ccw(c7185,3738.28) 7170.82,3724.18 7249.2,3645.8 ccw(c7263.28,3660) 7263.22,3640 7770,3640 7896.72,3640 cw(c7896.72,3620) 7910.8,3634.2 7984.14,3560.86 cw(c7970,3546.72) 7990,3546.72 7990,613.28 cw(c7970,613.28) 7984.14,599.14 7865.82,480.82 cw(c7851.72,495) 7851.72,475 5103.22,475 cw(c5103.28,495) 5089.2,480.8 5025.81,544.19 cw(c5040,558.28) 5020,558.28 5020,785 5020,1291.72 5020,1291.78 ccw(c5000,1291.72) 5014.18,1305.82 4960.86,1359.14 ccw(c4946.72,1345) 4946.72,1365 3823.28,1365 ccw(c3823.28,1345) 3809.18,1359.18 3730.8,1280.8 ccw(c3745,1266.72) 3725,1266.78 SIG1.VIA@3725,765
SIG2: GATE2.2 SIG2.VIA | length 33168.1
  LV w20: GATE2.2 1118.28,2100 1118.22,2100 ccw(c1118.28,2080) 1104.18,2094.18 1030.8,2020.8 ccw(c1045,2006.72) 1025,2006.78 1025,1273.28 ccw(c1045,1273.28) 1030.82,1259.18 1109.2,1180.8 ccw(c1123.28,1195) 1123.22,1175 3446.72,1175 cw(c3446.72,1155) 3460.86,1169.14 SIG2.VIA@3865,765
  SIGLoop w20: SIG2.VIA@730,3715 1101.72,3715 ccw(c1101.72,3735) 1115.82,3720.82 1169.18,3774.18 ccw(c1155,3788.28) 1175,3788.28 1175,4656.72 ccw(c1155,4656.72) 1169.1,4670.9 1110.8,4729.2 ccw(c1096.72,4715) 1096.72,4735 710,4735 590,4735 430,4895 430,7811.78 cw(c450,7811.72) 435.8,7825.8 639.18,8029.18 cw(c653.28,8015) 653.22,8035 653.28,8035 3606.72,8035 cw(c3606.72,8015) 3620.86,8029.14 3769.18,7880.82 cw(c3755,7866.72) 3775,7866.78 3775,7866.72 3775,7635 3775,7188.28 ccw(c3795,7188.28) 3780.81,7174.19 3809.2,7145.8 ccw(c3823.28,7160) 3823.22,7140 4731.72,7140 ccw(c4731.72,7160) 4745.82,7145.82 4789.2,7189.2 ccw(c4775,7203.28) 4795,7203.28 4795,7655 4795,7976.78 cw(c4815,7976.72) 4800.8,7990.8 4884.14,8074.14 cw(c4898.28,8060) 4898.28,8080 8024.94,8080 cw(c8025,8005) 8100,8005 8100,4878.28 cw(c8080,4878.28) 8094.2,4864.2 8035.82,4805.82 cw(c8021.72,4820) 8021.72,4800 7760,4800 7378.28,4800 7378.22,4800 ccw(c7378.28,4780) 7364.18,4794.18 7280.8,4710.8 ccw(c7295,4696.72) 7275,4696.78 7275,3893.28 ccw(c7295,3893.28) 7280.82,3879.18 7374.2,3785.8 ccw(c7388.28,3800) 7388.22,3780 7770,3780 8051.72,3780 cw(c8051.72,3760) 8065.8,3774.2 8114.1,3725.89 cw(c8100,3711.72) 8120,3711.72 8120,478.28 cw(c8100,478.28) 8114.14,464.14 8010.82,360.82 cw(c7996.72,375) 7996.72,355 4973.22,355 cw(c4973.28,375) 4959.2,360.8 4890.82,429.18 cw(c4905,443.28) 4885,443.28 SIG2.VIA@4885,785 ; SIG2.VIA@3865,765 3865,1146.78 cw(c3885,1146.72) 3870.8,1160.8 3924.18,1214.18 cw(c3938.28,1200) 3938.28,1220 4836.72,1220 cw(c4836.72,1200) 4850.86,1214.14 4879.14,1185.86 cw(c4865,1171.72) 4885,1171.73 ; SIG2.VIA@4885,785.04 4885,1171.72
SIG3: GATE3.2 SIG3.VIA | length 33050.7
  LV w20: SIG3.VIA@4645,7650 4984.14,7310.86 ccw(c4998.28,7325) 4998.28,7305 6916.72,7305 cw(c6916.72,7285) 6930.86,7299.14 7084.1,7145.89 cw(c7070,7131.72) 7090,7131.72 7090,6333.28 cw(c7070,6333.28) 7084.18,6319.18 6970.82,6205.82 cw(c6956.72,6220) 6956.72,6200 GATE3.2
  SIGLoop w20: SIG3.VIA@730,3855 966.72,3855 ccw(c966.72,3875) 980.82,3860.82 1049.18,3929.18 ccw(c1035,3943.28) 1055,3943.28 1055,4220 1055,4516.72 ccw(c1035,4516.72) 1049.18,4530.82 1000.8,4579.2 ccw(c986.72,4565) 986.72,4585 715,4585 445,4585 302.93,4727.07 cw(c310,4734.14) 300,4734.14 300,8021.78 cw(c320,8021.72) 305.8,8035.8 439.18,8169.18 cw(c453.28,8155) 453.28,8175 3761.72,8175 cw(c3761.72,8155) 3775.86,8169.14 3909.18,8035.82 cw(c3895,8021.72) 3915,8021.78 3915,8021.72 3915,7635 3915,7303.28 ccw(c3935,7303.28) 3920.81,7289.19 3954.14,7255.86 3954.18,7255.82 ccw(c3968.28,7270) 3968.28,7250 4596.72,7250 ccw(c4596.72,7270) 4610.86,7255.86 4639.2,7284.2 ccw(c4625,7298.28) 4645,7298.28 4645,7650 4645,8106.78 cw(c4665,8106.72) 4650.8,8120.8 4734.18,8204.18 cw(c4748.28,8190) 4748.28,8210 8135,8210 cw(c8135,8100) 8245,8100 8245,4768.28 cw(c8225,4768.28) 8239.2,4754.2 8150.82,4665.82 cw(c8136.72,4680) 8136.72,4660 7760,4660 7503.28,4660 7503.22,4660 ccw(c7503.28,4640) 7489.18,4654.18 7425.8,4590.8 ccw(c7440,4576.72) 7420,4576.78 7420,4003.28 ccw(c7440,4003.28) 7425.82,3989.18 7479.19,3935.81 ccw(c7493.28,3950) 7493.28,3930 7755.02,3930 7765,3930 8131.72,3930 cw(c8131.72,3910) 8145.8,3924.2 8249.18,3820.82 cw(c8235,3806.72) 8255,3806.78 8255,3806.72 8255,358.28 cw(c8235,358.28) 8249.18,344.18 8155.82,250.82 cw(c8141.72,265) 8141.72,245 4828.22,245 cw(c4828.28,265) 4814.2,250.8 4750.82,314.18 cw(c4765,328.28) 4745,328.28 4745,785 4745,1001.72 ; SIG3.VIA@4015,770 4015,996.78 cw(c4035,996.72) 4020.8,1010.8 4054.18,1044.18 cw(c4068.28,1030) 4068.28,1050 4696.72,1050 cw(c4696.72,1030) 4710.86,1044.14 4739.14,1015.86 cw(c4725,1001.72) 4745,1001.73
SIG4: GATE4.2 SIG4.VIA | length 33593.4
  LV w20: GATE4.2 5923.28,2140 5923.22,2140 ccw(c5923.28,2120) 5909.18,2134.18 5800.8,2025.8 ccw(c5815,2011.72) 5795,2011.78 5795,1543.28 ccw(c5815,1543.28) 5800.82,1529.18 5839.2,1490.8 ccw(c5853.28,1505) 5853.22,1485 7375,1485 ccw(c7375,1570) 7460,1570 7460,4010 cw(c7525,4010) 7525,4075 SIG4.VIA@7765,4075
  SIGLoop w10: SIG4.VIA@725,4440 SIG4.VIA@727.5,4437.5 ; SIG4.VIA@727.5,3997.5 SIG4.VIA@730,3995 ; SIG4.VIA@4055,7635 SIG4.VIA@4057.5,7637.5 ; SIG4.VIA@4160,780 SIG4.VIA@4162.5,782.5 ; SIG4.VIA@4497.5,7637.5 SIG4.VIA@4500,7640 ; SIG4.VIA@4602.5,782.5 SIG4.VIA@4605,785 ; SIG4.VIA@7760,4520 SIG4.VIA@7762.5,4517.5 ; SIG4.VIA@7762.5,4077.5 SIG4.VIA@7765,4075
  SIGLoop w20: SIG4.VIA@725,4440 305,4440 115,4630 115,8146.78 cw(c135,8146.72) 120.8,8160.8 284.18,8324.18 cw(c298.28,8310) 298.28,8330 3911.72,8330 cw(c3911.72,8310) 3925.86,8324.14 4049.18,8200.82 cw(c4035,8186.72) 4055,8186.78 4055,8186.72 SIG4.VIA@4055,7635 ; SIG4.VIA@727.5,3997.5 SIG4.VIA@727.5,4437.5 ; SIG4.VIA@4057.5,7637.5 SIG4.VIA@4497.5,7637.5 ; SIG4.VIA@4162.5,782.5 SIG4.VIA@4602.5,782.5 ; SIG4.VIA@4500,7640 4500,8236.78 cw(c4520,8236.72) 4505.8,8250.8 4589.18,8334.18 cw(c4603.28,8320) 4603.28,8340 8245,8340 cw(c8245,8220) 8365,8220 8365,4613.28 cw(c8345,4613.28) 8359.2,4599.2 8285.82,4525.82 cw(c8271.72,4540) 8271.72,4520 SIG4.VIA@7760,4520 ; SIG4.VIA@4605,785 4605,238.28 ccw(c4625,238.28) 4610.82,224.18 4694.2,140.8 ccw(c4708.28,155) 4708.22,135 8276.72,135 ccw(c8276.72,155) 8290.82,140.82 8369.18,219.18 ccw(c8355,233.28) 8375,233.28 8375,4001.72 8375,4001.78 ccw(c8355,4001.72) 8369.18,4015.82 8315.8,4069.2 ccw(c8301.72,4055) 8301.72,4075 SIG4.VIA@7765,4075 ; SIG4.VIA@7762.5,4077.5 SIG4.VIA@7762.5,4517.5
pads on no net: HRL30.2 HRL30.6 HRL30.8 HRL30.9 HRL30.10 HRL30.11

## Polygon pours and split planes (outlines as drawn)
GND on LV "GND_L01_P000" (solid, pour order 0): 50,50 8450,50 8450,8450 50,8450

## Other copper
Multi-Layer:
  lines w5: 0,0 8500,0 8500,8500 0,8500 0,8470 0,0

## Text inside footprints (layer, text, board x,y; h text height)
GATE1: Top Overlay "*" at 2321.63,6127.92 h50 r180; Mechanical 13 "*" at 2250.14,6157.94 h50 r180
GATE2: Top Overlay "*" at 1288.37,2167.08 h50; Mechanical 13 "*" at 1359.86,2137.06 h50
GATE3: Top Overlay "*" at 6881.63,6132.92 h50 r180; Mechanical 13 "*" at 6810.14,6162.94 h50 r180
GATE4: Top Overlay "*" at 6043.37,2207.08 h50; Mechanical 13 "*" at 6114.86,2177.06 h50
ZEN1: Top Overlay "*" at 1529,6311 h20 r90; Mechanical 13 "*" at 1515,6336.5 h50 r90
ZEN2: Top Overlay "*" at 2046,1989 h20 r270; Mechanical 13 "*" at 2060,1963.5 h50 r270
ZEN3: Top Overlay "*" at 6114,6336 h20 r90; Mechanical 13 "*" at 6100,6361.5 h50 r90
ZEN4: Top Overlay "*" at 6796,2019 h20 r270; Mechanical 13 "*" at 6810,1993.5 h50 r270